# Altium PCB PCB1.PcbDoc (part 1 of 2)
Units mil, origin at the board's own origin, x right, y up, seen from the top; angles counter-clockwise.
Board outline 2560 x 1880 mil, 4 copper layers (Top Layer, GND, VCC, Bottom Layer), stack 23.756 mil thick; 154 components, 113 nets, 515 pads, 218 vias.
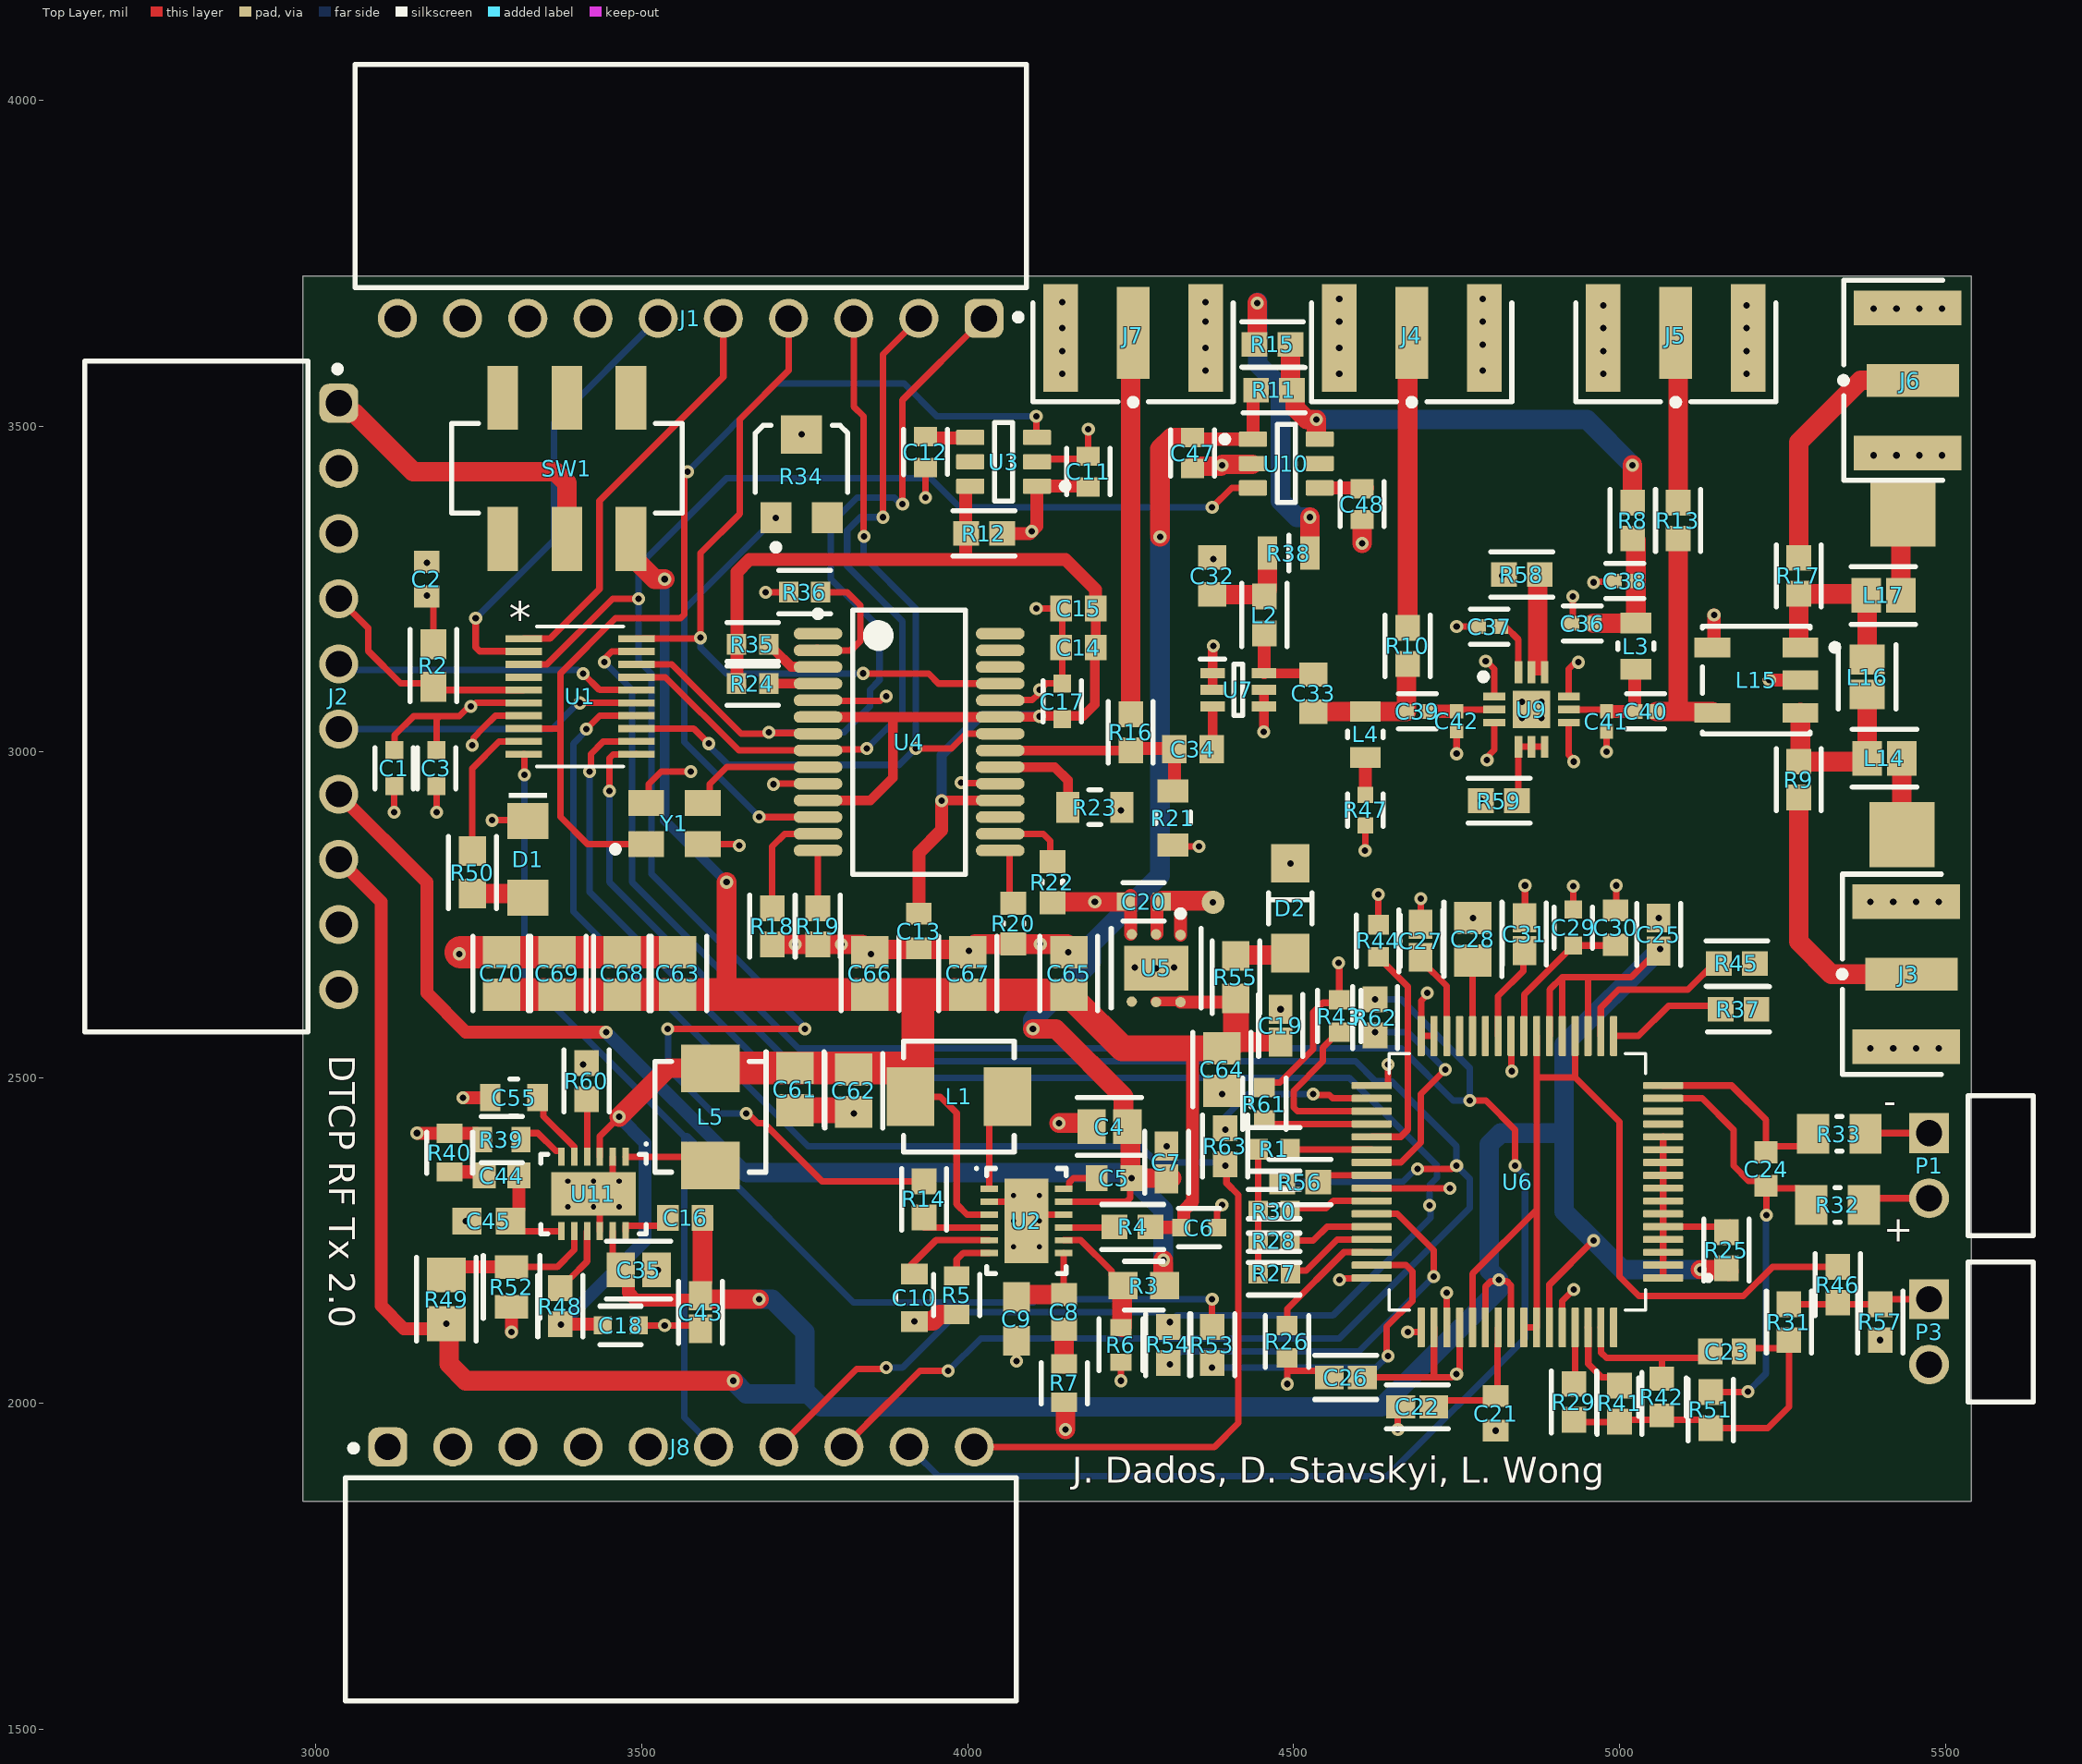
[diagram p0: Top Layer view]
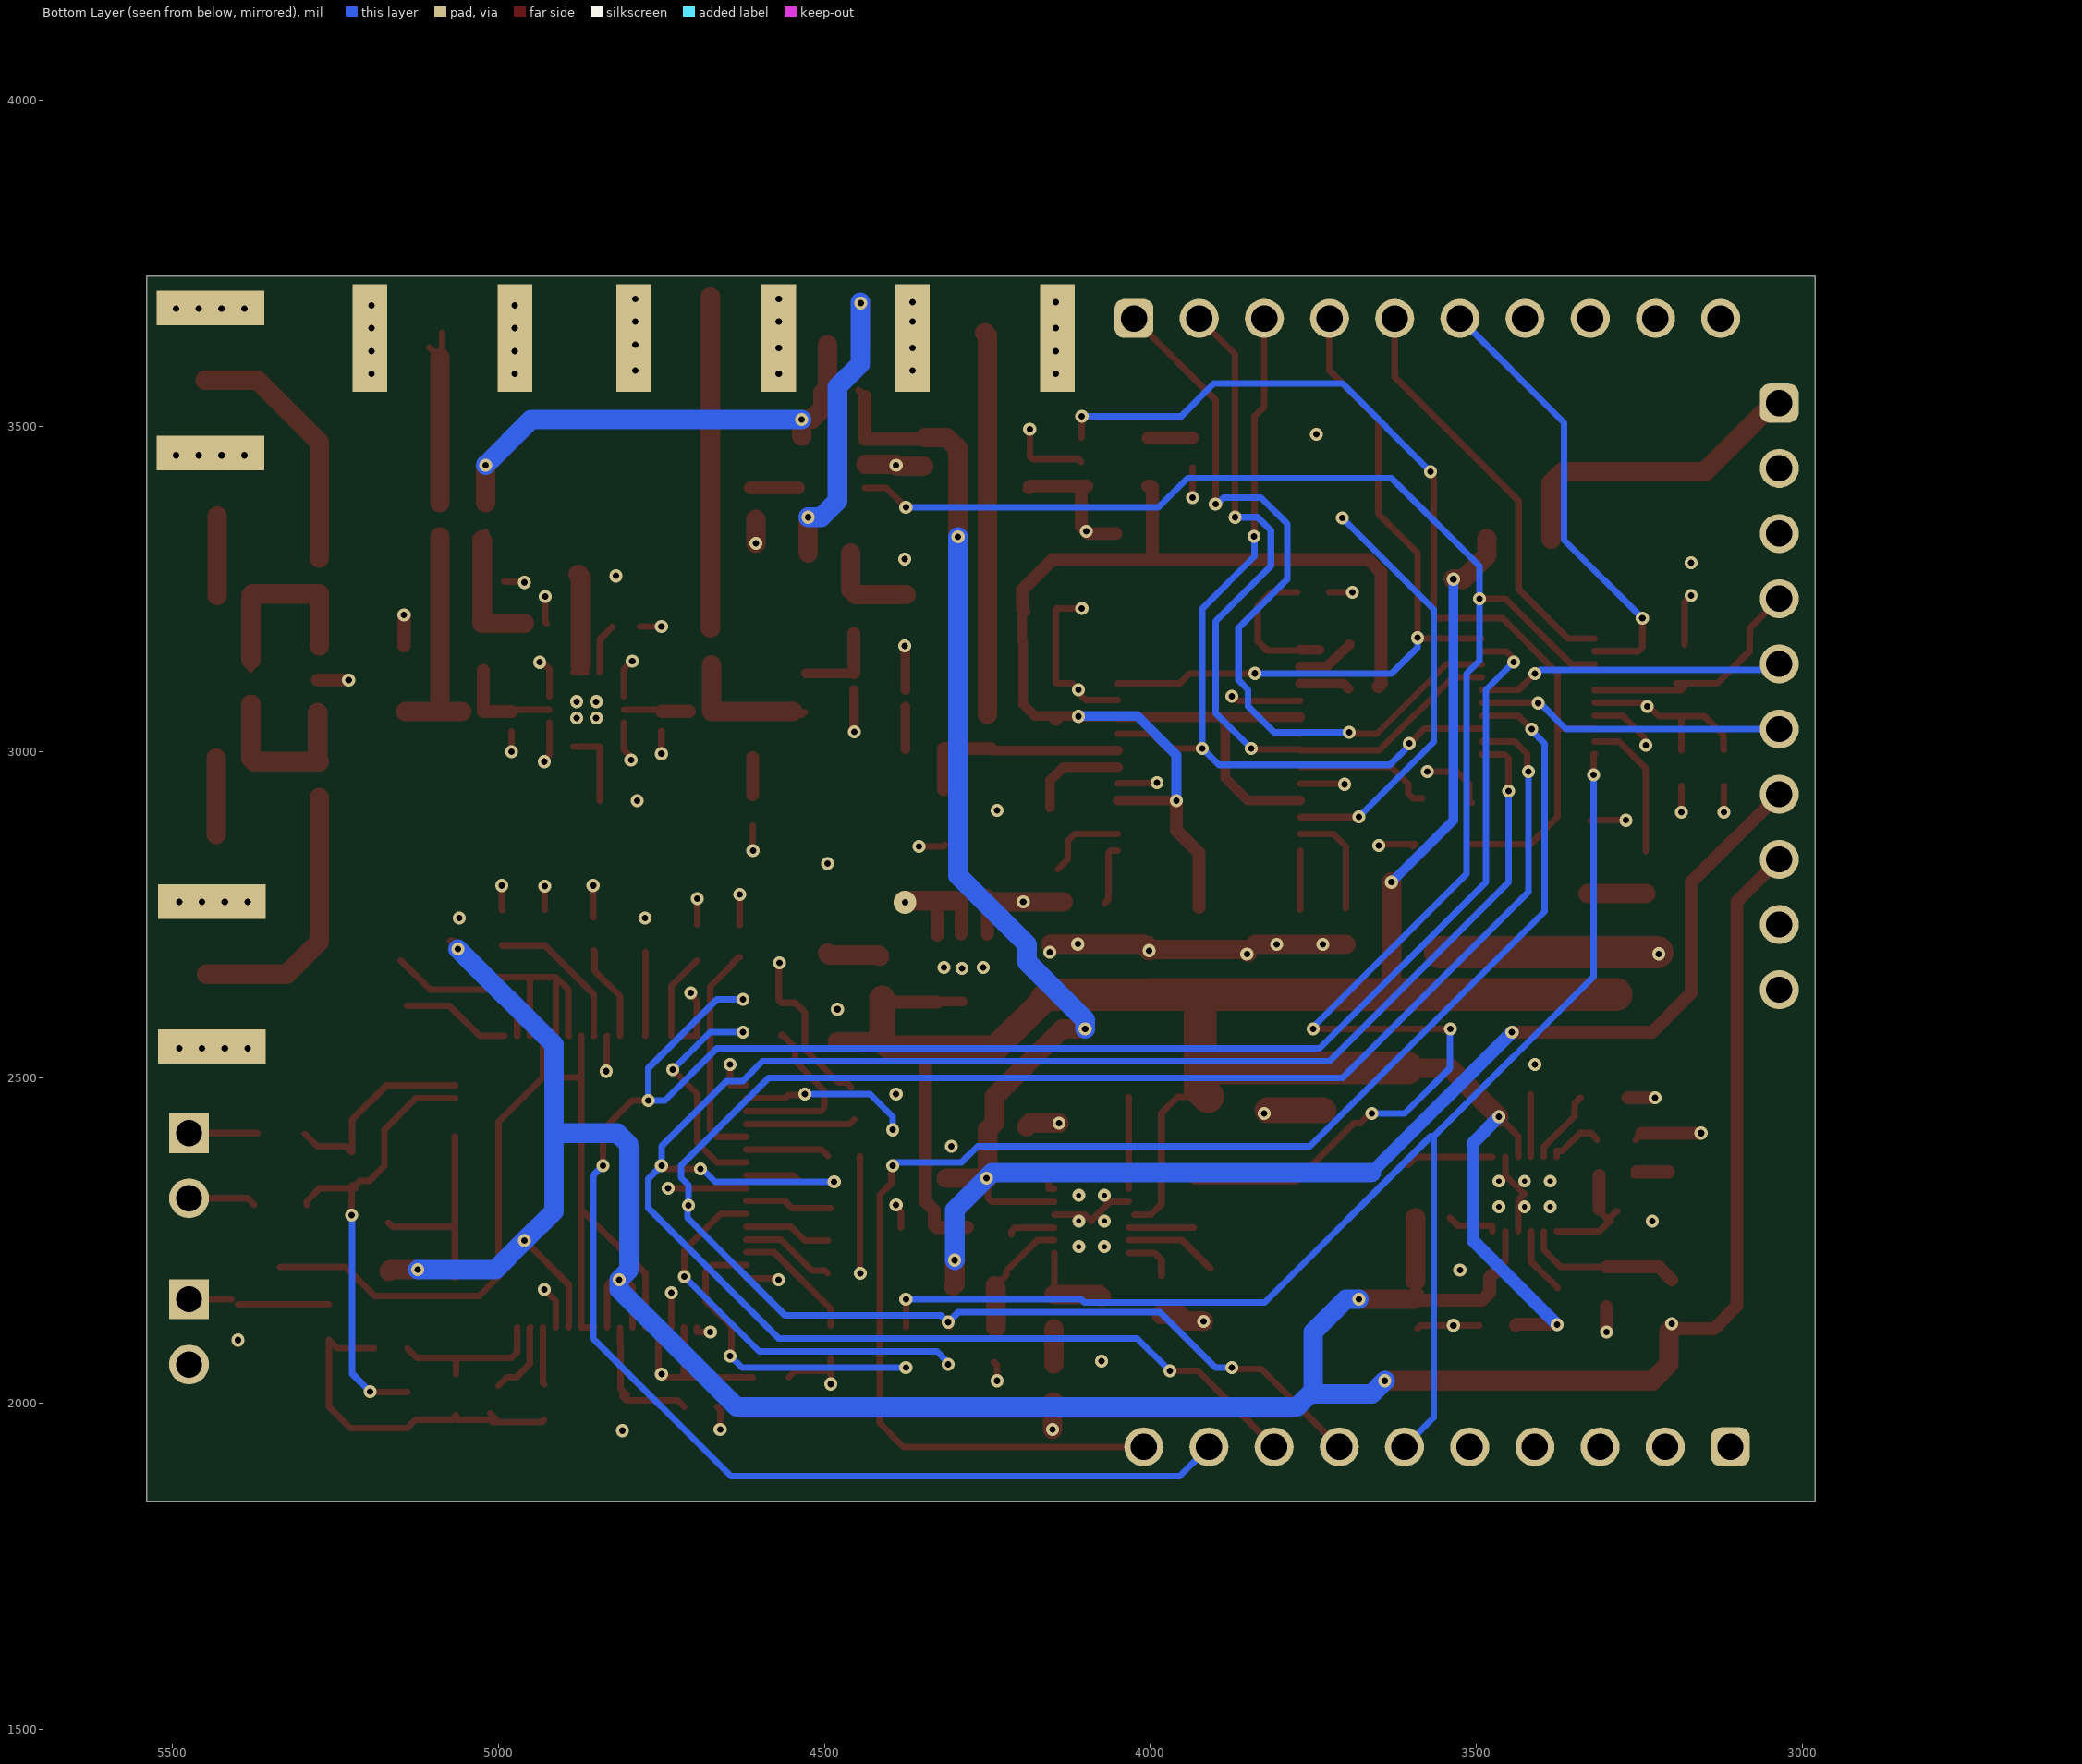
[diagram p1: Bottom Layer view, seen from below]

## Layer stack, top to bottom
Top Solder: solder mask 0.4, Solder Resist, Dk 3.5
Top Layer: signal copper 1.4
Dielectric 2: prepreg 2.8, PP-006, Dk 4.1
GND: signal copper 1.378
Dielectric 1: dielectric 12.6, FR-4, Dk 4.8
VCC: signal copper 1.378
Dielectric 3: prepreg 2.8, PP-006, Dk 4.1
Bottom Layer: signal copper 1.4
Bottom Solder: solder mask 0.4, Solder Resist, Dk 3.5

## Board outline
2980,1850 2980,3730 5540,3730 5540,1850

## Design rules (kind name [scope] priority, off if disabled: settings)
AssemblyTestPointUsage [All] p0: scope1count=1 scope1_0_kind=Board scope1_0_value=Board scope2count=1 scope2_0_kind=Board scope2_0_value=Board commentlength=0
AssemblyTestpoint [All] p0: scope1count=1 scope1_0_kind=Board scope1_0_value=Board scope2count=1 scope2_0_kind=Board scope2_0_value=Board commentlength=0
Clearance [All] p0: scope1count=1 scope1_0_kind=Board scope1_0_value=Board scope2count=1 scope2_0_kind=Board scope2_0_value=Board commentlength=0 gap=10
Clearance [All] p1: gap=10 ignorepadtopadclearanceinfootprint=FALSE except(0: Arc-Hole Track-Hole SMDPad-Hole THPad-Hole Via-Hole Fill-Hole Poly-Hole Region-Hole Text-Hole; 2: SMDPad-SMDPad; 5: Arc-Arc Arc-Track Arc-SMDPad Track-Track Track-SMDPad; 20: Arc-Fill Arc-Poly Arc-Region Track-Fill Track-Poly Track-Region Fill-Fill Fill-Poly Fill-Region Poly-Poly Poly-Region Region-Region)
ComponentClearance [All] p0: scope1count=1 scope1_0_kind=Board scope1_0_value=Board scope2count=1 scope2_0_kind=Board scope2_0_value=Board commentlength=0 gap=10 collisioncheckmode=3
DiffPairsRouting [All] p0: scope1count=1 scope1_0_kind=Board scope1_0_value=Board scope2count=1 scope2_0_kind=Board scope2_0_value=Board commentlength=0
FabricationTestPointUsage [All] p0: scope1count=1 scope1_0_kind=Board scope1_0_value=Board scope2count=1 scope2_0_kind=Board scope2_0_value=Board commentlength=0 valid=0 allowmultiple=FALSE
FabricationTestpoint [All] p0: scope1count=1 scope1_0_kind=Board scope1_0_value=Board scope2count=1 scope2_0_kind=Board scope2_0_value=Board commentlength=0 side=3 testpointundercomponent=TRUE minsize=40 maxsize=100 preferedsize=60 minholesize=0 maxholesize=40 preferedholesize=32 testpointgrid=1
FanoutControl Fanout_BGA [All] p0 off: scope1count=1 scope1_0_kind=Board scope1_0_value=Board scope2count=1 scope2_0_kind=Board scope2_0_value=Board commentlength=69 // Protel DXP Scope 1 Expression Was: IsBGA   Fanout_BGA (Default Rule)
FanoutControl Fanout_LCC [All] p0 off: scope1count=1 scope1_0_kind=Board scope1_0_value=Board scope2count=1 scope2_0_kind=Board scope2_0_value=Board commentlength=69 // Protel DXP Scope 1 Expression Was: IsLCC   Fanout_LCC (Default Rule)
FanoutControl Fanout_SOIC [All] p0 off: scope1count=1 scope1_0_kind=Board scope1_0_value=Board scope2count=1 scope2_0_kind=Board scope2_0_value=Board commentlength=71 // Protel DXP Scope 1 Expression Was: IsSOIC   Fanout_SOIC (Default Rule)
FanoutControl Fanout_Small [All] p0 off: scope1count=1 scope1_0_kind=Board scope1_0_value=Board scope2count=1 scope2_0_kind=Board scope2_0_value=Board commentlength=84 // Protel DXP Scope 1 Expression Was: (CompPinCount < 5)   Fanout_Small (Default Rule)
FanoutControl Fanout_Default [All] p0: scope1count=1 scope1_0_kind=Board scope1_0_value=Board scope2count=1 scope2_0_kind=Board scope2_0_value=Board commentlength=30 // Fanout_Default (Default Rule)
Height [All] p0: scope1count=1 scope1_0_kind=Board scope1_0_value=Board scope2count=1 scope2_0_kind=Board scope2_0_value=Board commentlength=0
HoleSize [All] p0: scope1count=1 scope1_0_kind=Board scope1_0_value=Board scope2count=1 scope2_0_kind=Board scope2_0_value=Board commentlength=0 absolutevalues=TRUE maxlimit=100 minlimit=1 maxpercent=80.000 minpercent=20.000
HoleToHoleClearance [All] p0: scope1count=1 scope1_0_kind=Board scope1_0_value=Board scope2count=1 scope2_0_kind=Board scope2_0_value=Board commentlength=0
LayerPairs [All] p0: scope1count=1 scope1_0_kind=Board scope1_0_value=Board scope2count=1 scope2_0_kind=Board scope2_0_value=Board commentlength=0 enforce=TRUE
MinimumSolderMaskSliver [All] p0: scope1count=1 scope1_0_kind=Board scope1_0_value=Board scope2count=1 scope2_0_kind=Board scope2_0_value=Board commentlength=0
NetAntennae [All] p0: scope1count=1 scope1_0_kind=Board scope1_0_value=Board scope2count=1 scope2_0_kind=Board scope2_0_value=Board commentlength=0
PasteMaskExpansion [All] p0: scope1count=1 scope1_0_kind=Board scope1_0_value=Board scope2count=1 scope2_0_kind=Board scope2_0_value=Board commentlength=0 expansion=0
PlaneClearance [All] p0: scope1count=1 scope1_0_kind=Board scope1_0_value=Board scope2count=1 scope2_0_kind=Board scope2_0_value=Board commentlength=0 clearance=40
PlaneClearance [All] p1: clearance=40
PlaneConnect [All] p0: scope1count=1 scope1_0_kind=Board scope1_0_value=Board scope2count=1 scope2_0_kind=Board scope2_0_value=Board commentlength=0 planeconnectstyle=Relief reliefexpansion=20 reliefentries=4 reliefconductorwidth=10 reliefairgap=10
PolygonConnect [All] p0: scope1count=1 scope1_0_kind=Board scope1_0_value=Board scope2count=1 scope2_0_kind=Board scope2_0_value=Board commentlength=0 connectstyle=Direct reliefconductorwidth=10 reliefentries=4 polygonreliefangle="90 Angle"
PolygonConnect [All] p1: connectstyle=Direct reliefconductorwidth=10 reliefentries=4 polygonreliefangle="90 Angle" airgapwidth=10
RoutingCorners [All] p0: scope1count=1 scope1_0_kind=Board scope1_0_value=Board scope2count=1 scope2_0_kind=Board scope2_0_value=Board commentlength=0 cornerstyle=45-Degree minsetback=100 maxsetback=100
RoutingLayers [All] p0: scope1count=1 scope1_0_kind=Board scope1_0_value=Board scope2count=1 scope2_0_kind=Board scope2_0_value=Board commentlength=0 top layer=Automatic mid layer 1=Automatic mid layer 2=Automatic bottom layer=Automatic
RoutingPriority [All] p0: scope1count=1 scope1_0_kind=Board scope1_0_value=Board scope2count=1 scope2_0_kind=Board scope2_0_value=Board commentlength=0
RoutingTopology [All] p0: scope1count=1 scope1_0_kind=Board scope1_0_value=Board scope2count=1 scope2_0_kind=Board scope2_0_value=Board commentlength=0 topology=Shortest
RoutingVias [All] p0: scope1count=1 scope1_0_kind=Board scope1_0_value=Board scope2count=1 scope2_0_kind=Board scope2_0_value=Board commentlength=0 holewidth=28 width=50 viastyle="Through Hole" minholewidth=28 minwidth=50 maxholewidth=28 maxwidth=50
RoutingVias [All] p1: holewidth=28 width=50 viastyle="Through Hole" minholewidth=28 minwidth=50 maxholewidth=28 maxwidth=50
ShortCircuit [All] p0: scope1count=1 scope1_0_kind=Board scope1_0_value=Board scope2count=1 scope2_0_kind=Board scope2_0_value=Board commentlength=0 allowed=FALSE
SilkToBoardRegionClearance [All] p0: scope1count=1 scope1_0_kind=Board scope1_0_value=Board scope2count=1 scope2_0_kind=Board scope2_0_value=Board commentlength=0
SilkToSilkClearance [All] p0: scope1count=1 scope1_0_kind=Board scope1_0_value=Board scope2count=1 scope2_0_kind=Board scope2_0_value=Board commentlength=0
SilkToSolderMaskClearance [All] p0 off: scope1count=1 scope1_0_kind=Board scope1_0_value=Board scope2count=1 scope2_0_kind=Board scope2_0_value=Board commentlength=44 // Protel DXP Scope 1 Expression Was: IsPad
SolderMaskExpansion [All] p0: scope1count=1 scope1_0_kind=Board scope1_0_value=Board scope2count=1 scope2_0_kind=Board scope2_0_value=Board commentlength=0 expansion=4
SolderMaskExpansion [All] p1: expansion=4 istentingtop=FALSE
SupplyNets "Schematic Supply Nets_8" [All] p0: scope1count=1 scope1_0_kind=Net scope1_0_value=3V3 scope2count=1 scope2_0_kind=Board scope2_0_value=Board commentlength=0 voltage=0.000
SupplyNets "Schematic Supply Nets_7" [All] p0: scope1count=1 scope1_0_kind=Net scope1_0_value=3V3DDS scope2count=1 scope2_0_kind=Board scope2_0_value=Board commentlength=0 voltage=0.000
SupplyNets "Schematic Supply Nets_6" [All] p0: scope1count=1 scope1_0_kind=Net scope1_0_value=13V0 scope2count=1 scope2_0_kind=Board scope2_0_value=Board commentlength=0 voltage=0.000
SupplyNets "Schematic Supply Nets_5" [All] p0: scope1count=1 scope1_0_kind=Net scope1_0_value=13V0PA scope2count=1 scope2_0_kind=Board scope2_0_value=Board commentlength=0 voltage=0.000
SupplyNets "Schematic Supply Nets_4" [All] p0: scope1count=1 scope1_0_kind=Net scope1_0_value=VBAT scope2count=1 scope2_0_kind=Board scope2_0_value=Board commentlength=0 voltage=0.000
SupplyNets "Schematic Supply Nets_3" [All] p0: scope1count=1 scope1_0_kind=Net scope1_0_value=GND scope2count=1 scope2_0_kind=Board scope2_0_value=Board commentlength=0 voltage=0.000
SupplyNets "Schematic Supply Nets_2" [All] p0: scope1count=1 scope1_0_kind=Net scope1_0_value=AFE_AGND scope2count=1 scope2_0_kind=Board scope2_0_value=Board commentlength=0 voltage=0.000
SupplyNets "Schematic Supply Nets_1" [All] p0: scope1count=1 scope1_0_kind=Net scope1_0_value=PA1_VDD scope2count=1 scope2_0_kind=Board scope2_0_value=Board commentlength=0 voltage=0.000
SupplyNets "Schematic Supply Nets" [All] p0: scope1count=1 scope1_0_kind=Net scope1_0_value=5V0 scope2count=1 scope2_0_kind=Board scope2_0_value=Board commentlength=0 voltage=0.000
SupplyNets "Schematic Supply Nets_8" [InNet('3V3')] p1: voltage=0.000
SupplyNets "Schematic Supply Nets_7" [InNet('3V3DDS')] p2: voltage=0.000
SupplyNets "Schematic Supply Nets_6" [InNet('13V0')] p3: voltage=0.000
SupplyNets "Schematic Supply Nets_5" [InNet('13V0PA')] p4: voltage=0.000
SupplyNets "Schematic Supply Nets_4" [InNet('VBAT')] p5: voltage=0.000
SupplyNets "Schematic Supply Nets_3" [InNet('GND')] p6: voltage=0.000
SupplyNets "Schematic Supply Nets_2" [InNet('AFE_AGND')] p7: voltage=0.000
SupplyNets "Schematic Supply Nets_1" [InNet('PA1_VDD')] p8: voltage=0.000
SupplyNets "Schematic Supply Nets" [InNet('5V0')] p9: voltage=0.000
UnRoutedNet [All] p0: scope1count=1 scope1_0_kind=Board scope1_0_value=Board scope2count=1 scope2_0_kind=Board scope2_0_value=Board commentlength=0
UnpouredPolygon [All] p0: scope1count=1 scope1_0_kind=Board scope1_0_value=Board scope2count=1 scope2_0_kind=Board scope2_0_value=Board commentlength=0
Width [All] p0: scope1count=1 scope1_0_kind=Board scope1_0_value=Board scope2count=1 scope2_0_kind=Board scope2_0_value=Board commentlength=0 maxlimit=80 minlimit=10 preferedwidth=10
Width [All] p1: maxlimit=80 minlimit=10 preferedwidth=10
29 further rules are at their usual default settings.

## Classes and differential pairs
component class "U_Boost 5V": C16 C18 C35 C43 C44 C45 C55 L5 R39 R40 R48 R49 R52 R60 U11
component class U_Switch2: C47 C48 U10
component class U_Switch1: C11 C12 U3
component class "U_PA stage 2": C36 C37 C38 C39 C40 C41 C42 L3 L4 R47 R58 R59 U9
component class "U_PA stage 1": C32 C33 C34 L2 R38 U7
component class U_Output: L14 L15 L16 L17
component class U_LDO: C19 C20 U5
component class U_DDS: C13 C14 C15 C17 R18 R19 R20 R21 R22 R23 R24 R34 R35 R36 U4 Y1
component class U_AFE: C21 C22 C23 C24 C25 C26 C27 C28 C29 C30 C31 R1 R25 R26 R27 R28 R29 R30 R31 R32 R33 R37 R41 R42 R43 R44 R45 R46 R51 R53 R54 R56 R57 R61 R62 R63 U6
component class U_MCU: C1 C2 C3 D1 R2 R50 U1
component class System: C61 C62 C63 C64 C65 C66 C67 C68 C69 C70 D2 J1 J2 J3 J4 J5 J6 J7 J8 P1 P3 R8 R9 R10 R11 R12 R13 R15 R16 R17 R55 SW1
component class "U_Boost 12V": C4 C5 C6 C7 C8 C9 C10 L1 R3 R4 R5 R6 R7 R14 U2

## Components (designator, comment, footprint, x,y, rotation, side; value= is the part's Value field where it differs from the comment)
C1 "C1608X5R1A106K080AC" FP-C1608-080-0_1-MFG 3120,2975 r90 top
C2 "VJ0603Y104KXJAP" CAPC1608X92X38NL15T08 3170,3265 r270 top
C3 "C1608X5R1A106K080AC" FP-C1608-080-0_1-MFG 3185,2975 r90 top
C4 "CC0805MKX5R8BB226" FP-CC0805-0_2-1_45-IPC_C 4217.41,2425 r180 top
C5 "VJ0603Y104KXJAP" CAPC1608X92X38NL15T08 4224.57,2345.87 r0 top
C6 "C1608X5R1A106K080AC" FP-C1608-080-0_1-MFG 4355,2270 r180 top
C7 "C1608X5R1H105K080AB" FP-C1608-080-0_1-IPC_B 4305,2370 r90 top
C8 "C0603C331J5GALTU" CAPC1608X87X35NL15T15 4147.99,2140.87 r90 top
C9 "VJ0603A100KXAAC" CAPC1608X92X38ML12T08 4075,2130 r90 top
C10 "C2012X5R1E475K125AB" FP-C2012-125-0_2-MFG 3917.99,2162.28 r270 top
C11 "C0603C106M8PACTU" FP-C0603C106M8PACTU-MFG 4185,3430 r270 top
C12 "C0603C101K4GAC7867" FP-C0603C-CF-MFG 3935,3460 r90 top
C13 "VJ0603Y104KXJAP" CAPC1608X92X38NL15T08 3925,2725 r90 top
C14 "VJ0603Y104KXJAP" CAPC1608X92X38NL15T08 4170,3160 r0 top
C15 "VJ0603Y104KXJAP" CAPC1608X92X38NL15T08 4170,3220 r0 top
C16 "VJ0603Y104KXJAP" CAPC1608X92X38NL15T08 3566.57,2285 r0 top
C17 "C1608X5R1A106K080AC" FP-C1608-080-0_1-MFG 4145,3077.44 r270 top
C18 "C1608X5R1A106K080AC" FP-C1608-080-0_1-MFG 3467.44,2120 r180 top
C19 "C1608X5R1H105K080AB" FP-C1608-080-0_1-IPC_B 4480,2580 r90 top
C20 "C1608X5R1A106K080AC" FP-C1608-080-0_1-MFG 4270,2770 r0 top
C21 "VJ0603Y104KXJAP" CAPC1608X92X38NL15T08 4810,1985 r270 top
C22 "C1608X5R1H105K080AB" FP-C1608-080-0_1-IPC_B 4689.78,1995 r180 top
C23 "VJ0603Y152JXACW1BC" CAPC1608X95X40NL15T15 5165,2080 r180 top
C24 "06035C472KAZ2A" CAPC1608X90X35LL15T15 5225,2360 r90 top
C25 "C1608X5R1H105K080AB" FP-C1608-080-0_1-IPC_B 5060,2719.78 r90 top
C26 "C1608X5R1H105K080AB" FP-C1608-080-0_1-IPC_B 4580,2040 r180 top
C27 "C1608X5R1H105K080AB" FP-C1608-080-0_1-IPC_B 4695,2710 r90 top
C28 "GRM21BR60J107ME15K" FP-GRM21B-0_2-e0_2_0_7-IPC_B 4775,2712.51 r90 top
C29 "C1608X5R1A106K080AC" FP-C1608-080-0_1-MFG 4929.1,2730.39 r270 top
C30 "VJ0603Y104KXJAP" CAPC1608X92X38NL15T08 4994.1,2730.39 r270 top
C31 "C1608X5R1H105K080AB" FP-C1608-080-0_1-IPC_B 4854.1,2720.39 r90 top
C32 "VJ0603Y183KXAAC" CAPC1608X92X38ML15T08 4375,3270 r90 top
C33 "VJ0603Y183KXAAC" CAPC1608X92X38ML15T08 4530,3090 r270 top
C34 "VJ0603Y183KXAAC" CAPC1608X92X38ML15T08 4345.59,3004.41 r0 top
C35 "CC0805MKX5R8BB226" FP-CC0805-0_2-1_45-IPC_C 3495,2205 r0 top
C36 "GRM155R71H104KE14D" FP-GRM155-0_05-IPC_B 4943.21,3197.09 r0 top
C37 "GRM155R71H104KE14D" FP-GRM155-0_05-IPC_B 4800.08,3192.09 r0 top
C38 "GRM1555C1H102JA01D" FP-GRM155-0_05-IPC_B 5008.21,3262.09 r0 top
C39 "GRM1555C1H102JA01D" FP-GRM155-0_05-IPC_B 4690.08,3062.09 r0 top
C40 "GRM1555C1H102JA01D" FP-GRM155-0_05-IPC_B 5040.08,3062.09 r0 top
C41 "GRM1555C1HR40WA01D" CAPC1005X55X25LL05T10 4980.08,3046.73 r90 top
C42 "GRM1555C1HR40WA01D" CAPC1005X55X25LL05T10 4750.08,3047.09 r90 top
C43 "C1608X5R1H105K080AB" FP-C1608-080-0_1-IPC_B 3590,2140 r270 top
C44 "C0603C331J5GALTU" CAPC1608X87X35NL15T15 3285,2350 r0 top
C45 "VJ0603A100KXAAC" CAPC1608X92X38ML12T08 3265,2280 r0 top
C47 "C0603C106M8PACTU" FP-C0603C106M8PACTU-MFG 4345,3458.62 r90 top
C48 "C0603C101K4GAC7867" FP-C0603C-CF-MFG 4605,3380 r90 top
C55 "C2012X5R1E475K125AB" FP-C2012-125-0_2-MFG 3303.58,2469.49 r180 top
C61 "GRM21BR60J107ME15K" FP-GRM21B-0_2-e0_2_0_7-IPC_B 3735,2482.51 r270 top
C62 "GRM21BR60J107ME15K" FP-GRM21B-0_2-e0_2_0_7-IPC_B 3825,2480 r270 top
C63 "GRM21BR60J107ME15K" FP-GRM21B-0_2-e0_2_0_7-IPC_B 3555,2660 r90 top
C64 "GRM21BR60J107ME15K" FP-GRM21B-0_2-e0_2_0_7-IPC_B 4390,2512.51 r270 top
C65 "GRM21BR60J107ME15K" FP-GRM21B-0_2-e0_2_0_7-IPC_B 4155,2660 r90 top
C66 "GRM21BR60J107ME15K" FP-GRM21B-0_2-e0_2_0_7-IPC_B 3850,2660 r90 top
C67 "GRM21BR60J107ME15K" FP-GRM21B-0_2-e0_2_0_7-IPC_B 4000,2660 r90 top
C68 "GRM21BR60J107ME15K" FP-GRM21B-0_2-e0_2_0_7-IPC_B 3470,2660 r90 top
C69 "GRM21BR60J107ME15K" FP-GRM21B-0_2-e0_2_0_7-IPC_B 3370,2660 r90 top
C70 "GRM21BR60J107ME15K" FP-GRM21B-0_2-e0_2_0_7-IPC_B 3285,2660 r90 top
D1 "150120SS75000" WL-SMCW_1206_150120xx75000 3325,2835 r270 top
D2 "HSMG-C150" FP-HSMG-C150-MFG 4495,2760 r270 top
J1 "613010143121" 613010143121 3575,3883.51 r180 top
J2 "613010143121" 613010143121 2816.49,3085 r270 top
J3 "SMA-J-P-H-ST-EM1" FP-SMA-J-P-H-ST-EM1-MFG 5710.08,2658.78 r90 top
J4 "SMA-J-P-H-ST-EM1" FP-SMA-J-P-H-ST-EM1-MFG 4681.22,3905.08 r180 top
J5 "SMA-J-P-H-ST-EM1" FP-SMA-J-P-H-ST-EM1-MFG 5086.22,3905.08 r180 top
J6 "SMA-J-P-H-ST-EM1" FP-SMA-J-P-H-ST-EM1-MFG 5712.2,3570 r90 top
J7 "SMA-J-P-H-ST-EM1" FP-SMA-J-P-H-ST-EM1-MFG 4253.78,3905.08 r180 top
J8 "613010143121" 613010143121 3560,1715 r0 top
L1 "IHLP1616BZER4R7M11" FP-IHLP-1616BZ-FP_1_8545x-MFG 3986.34,2470.87 r0 top
L2 "LQM18NNR82K00D" FP-LQM18NN_00-IPC_B 4455,3210 r90 top
L3 "0805LS-152XJEC" FP-LQW21HN_00-MFG 5025.08,3162.09 r90 top
L4 "LQW21HN1R5J00L" FP-LQW21HN_00-MFG 4610.08,3026.65 r90 top
L5 "IHLP1616BZER4R7M11" FP-IHLP-1616BZ-FP_1_8545x-MFG 3605,2440 r270 top
L14 "MLZ2012M1R0HTD25" FP-MLZ2012-1_25-IPC_C 5406.61,2990 r0 top
L15 "MABAES0060" FP-MABAES0060-MFG 5210,3110 r0 top
L16 "MLZ2012M1R0HTD25" FP-MLZ2012-1_25-IPC_C 5380,3115 r270 top
L17 "MLZ2012M1R0HTD25" FP-MLZ2012-1_25-IPC_C 5405,3240 r180 top
P1 "TSW-102-08-G-S-RA" SMTC-TSW-102-08-X-S-RA 5475,2415 r270 top
P3 "TSW-102-08-G-S-RA" SMTC-TSW-102-08-X-S-RA 5475,2160 r270 top
R1 "CRGCQ0603J10K" FP-CRGCQ0603-IPC_C 4470,2390 r180 top
R2 "ESR03EZPF3301" FP-ESR03-IPC_A 3180,3132.44 r90 top
R3 "RN73H1JTTD1113D25" FP-CRCW0603-e3-IPC_A 4270.09,2180.87 r0 top
R4 "RMCF0603ZG0R00" FP-RMCF0603-IPC_B 4252.99,2270.87 r180 top
R5 "CRCW060357K6FKEA" FP-CRCW0603-e3-MFG 3982.99,2166.34 r90 top
R6 "AC0603FR-1311K3L" FP-AC0603-IPC_C 4235,2090 r90 top
R7 "CRCW060386K6FKEAHP" FP-CRCW0603-HPe3-MFG 4147.99,2031.34 r90 top
R8 "RMCF0603ZG0R00" FP-RMCF0603-IPC_B 5020,3355 r90 top
R9 "RMCF0603ZG0R00" FP-RMCF0603-IPC_B 5275,2957.4 r270 top
R10 "RMCF0603ZG0R00" FP-RMCF0603-IPC_B 4675,3162.6 r270 top
R11 "DNF" FP-RMCF0603-IPC_B 4470,3555 r180 top
R12 "DNF" FP-RMCF0603-IPC_B 4025,3335 r0 top
R13 "RMCF0603ZG0R00" FP-RMCF0603-IPC_B 5090,3355 r270 top
R14 "RMCF0603ZG0R00" FP-RMCF0603-IPC_B 3932.99,2313.26 r270 top
R15 "RMCF0603ZG0R00" FP-RMCF0603-IPC_B 4467.6,3625 r0 top
R16 "RMCF0603ZG0R00" FP-RMCF0603-IPC_B 4250,3030 r270 top
R17 "RMCF0603ZG0R00" FP-RMCF0603-IPC_B 5275,3270 r270 top
R18 "DNF" FP-RMCF0603-IPC_B 3700,2732.4 r90 top
R19 "DNF" FP-RMCF0603-IPC_B 3770,2732.4 r90 top
R20 "DNF" RESC0603(1608)_N 4070,2736.5 r270 top
R21 "AC0805JR-0782RL" FP-AC0805-MFG 4315,2898.66 r270 top
R22 "DNF" RESC0603(1608)_N 4130,2800 r270 top
R23 "AC0805JR-0782RL" FP-AC0805-MFG 4195,2915 r0 top
R24 "CRGCQ0603J10K" FP-CRGCQ0603-IPC_C 3670,3105 r0 top
R25 "RMCF0603ZG0R00" FP-RMCF0603-IPC_B 5164.1,2235.39 r270 top
R26 "CRGCQ0603J10K" FP-CRGCQ0603-IPC_C 4490,2095 r270 top
R27 "CRGCQ0603J10K" FP-CRGCQ0603-IPC_C 4470.32,2200 r180 top
R28 "CRGCQ0603J10K" FP-CRGCQ0603-IPC_C 4470,2250 r180 top
R29 "RMCF0603ZG0R00" FP-RMCF0603-IPC_B 4930,2002.4 r90 top
R30 "CRGCQ0603J10K" FP-CRGCQ0603-IPC_C 4470,2295 r180 top
R31 "DNF" FP-RMCF0603-IPC_B 5260,2125 r90 top
R32 "CRCW08055K00FKTA" RESC2013X50X30ML20T20 5334.65,2305 r180 top
R33 "CRCW08055K00FKTA" RESC2013X50X30ML20T20 5337.23,2413.77 r180 top
R34 "TC33X-2-103E" BOUR-TC33X-2_V 3745,3430 r90 top
R35 "CRGCQ0603J10K" FP-CRGCQ0603-IPC_C 3670,3165 r0 top
R36 "CRGCQ0603J10K" FP-CRGCQ0603-IPC_C 3749.68,3245 r0 top
R37 "RMCF0603ZG0R00" FP-RMCF0603-IPC_B 5182.6,2605 r180 top
R38 "MCU08050C5109FP500" FP-MCU0805-IPC_C 4492.45,3305 r0 top
R39 "CRCW060357K6FKEA" FP-CRCW0603-e3-MFG 3285,2405 r0 top
R40 "CRCW060386K6FKEAHP" FP-CRCW0603-HPe3-MFG 3205,2385 r270 top
R41 "RMCF0603ZG0R00" FP-RMCF0603-IPC_B 5000,2000 r90 top
R42 "CRCW06031M00JNEA" FP-CRCW0603-e3-IPC_B 5065,2010 r90 top
R43 "CRGCQ0603J10K" FP-CRGCQ0603-IPC_C 4570,2594.68 r90 top
R44 "CRGCQ0603J10K" FP-CRGCQ0603-IPC_C 4630,2710 r90 top
R45 "RMCF0603ZG0R00" FP-RMCF0603-IPC_B 5180,2675 r0 top
R46 "DNF" FP-RMCF0603-IPC_B 5335,2182.4 r90 top
R47 "FCHP0402E50R0BBT1" FP-FC0402-MFG 4610.08,2910.59 r90 top
R48 "RMCF0603ZG0R00" FP-RMCF0603-IPC_B 3375,2149.49 r90 top
R49 "TFCR0805-10W-E-4222BT-1K" FP-TFCR0805-IPC_A 3200,2160 r270 top
R50 "CRCW0603220RFKEAHP" FP-CRCW0603-HPe3-IPC_A 3240,2815 r90 top
R51 "RMCF0603ZG0R00" FP-RMCF0603-IPC_B 5140,1990 r90 top
R52 "CRGP0805F10K" FP-CRGP0805-IPC_C 3300,2178.93 r90 top
R53 "RMCF0603ZG0R00" FP-RMCF0603-IPC_B 4375,2090 r90 top
R54 "RMCF0603ZG0R00" FP-RMCF0603-IPC_B 4307.5,2090 r90 top
R55 "CRCW0603220RFKEAHP" FP-CRCW0603-HPe3-IPC_A 4411.41,2654.17 r270 top
R56 "RMCF0603ZG0R00" FP-RMCF0603-IPC_B 4510,2340 r180 top
R57 "DNF" FP-RMCF0603-IPC_B 5400,2125 r90 top
R58 "RMCF0603ZG0R00" FP-RMCF0603-IPC_B 4850.08,3272.09 r0 top
R59 "RMCF0603ZG0R00" FP-RMCF0603-IPC_B 4815,2925 r0 top
R60 "RMCF0603ZG0R00" FP-RMCF0603-IPC_B 3415,2495 r270 top
R61 "CRGCQ0603J10K" FP-CRGCQ0603-IPC_C 4455,2460 r90 top
R62 "RMCF0603ZG0R00" FP-RMCF0603-IPC_B 4625,2592.4 r90 top
R63 "RMCF0603ZG0R00" FP-RMCF0603-IPC_B 4395,2395 r90 top
SW1 "452406020024" 452406020024 3385,3435 r180 top
U1 "MSPM0C1104SDGS20R" DGS0020A_TEX 3405,3085 r0 top
U2 "LTC3122EDE#PBF" LT-DE-UE-12_V 4090.08,2280.08 r0 top
U3 "TPS22810TDBVRQ1" FP-DBV0006A-MFG 4055,3445 r180 top
U4 "AD9850BRSZ-REEL" ADI-RS-28_N 3910,3015 r0 top
U5 "LD39200PU33R" FP-DFN6-7946637-MFG 4289.01,2667.99 r270 top
U6 "ADS1299-4PAG" QFP50P1200X1200X120-64N 4843.31,2340.39 r180 top
U7 "TQP369184" SOT65P210X110-6N 4415,3095 r0 top
U9 "PMA3-43-1W+" QFN51P300X300X89-13N 4865,3065 r0 top
U10 "TPS22810TDBVRQ1" FP-DBV0006A-MFG 4488.82,3442.4 r0 top
U11 "LTC3122EDE#PBF" LT-DE-UE-12_V 3425.79,2321.57 r270 top
Y1 "830207044109" WE-SPXO_CFPS-39 3550,2890 r0 top

## Footprints (in the part's own frame and the unit in brackets; to place one, negate y for a bottom-side part, rotate by r counter-clockwise, add the part's x,y. Pads: shape width x height; smd on the part's side, far side on the other; paste and mask are expansions set on the pad)
452406020024 [mm] "SMT Mini Slide Switch, Same Side Connection, body 9.00 x 3.50 mm"
  rect 1.2x2.5 smd: 1(2.5,2.75) 2(0,2.75) 3(-2.5,2.75) 4(2.5,-2.75) 5(0,-2.75) 6(-2.5,-2.75)
  silkscreen extent -4.5,-1.75 4.5,1.75
613010143121 [mm] "Socket Header, Pitch 2.54 mm, THT, Angled, single row, 10p"
  rrect50% 1.52x1.52 hole 1.02: 1(-11.43,5.55)
  round 1.52 hole 1.02: 2(-8.89,5.55) 3(-6.35,5.55) 4(-3.81,5.55) 5(-1.27,5.55) 6(1.27,5.55) 7(3.81,5.55) 8(6.35,5.55) 9(8.89,5.55) 10(11.43,5.55)
  silkscreen extent -13.08,-4.35 13.08,5.62
ADI-RS-28_N [mm] "SOP, 28-Leads, Body 10.2x5.3mm, Pitch 0.65mm, IPC Medium Density"
  oval 1.9x0.45 smd: 1(-3.55,4.225) 2(-3.55,3.575) 3(-3.55,2.925) 4(-3.55,2.275) 5(-3.55,1.625) 6(-3.55,0.975) 7(-3.55,0.325) 8(-3.55,-0.325) 9(-3.55,-0.975) 10(-3.55,-1.625) 11(-3.55,-2.275) 12(-3.55,-2.925) 13(-3.55,-3.575) 14(-3.55,-4.225) 15(3.55,-4.225) 16(3.55,-3.575) 17(3.55,-2.925) 18(3.55,-2.275) 19(3.55,-1.625) 20(3.55,-0.975) 21(3.55,-0.325) 22(3.55,0.325) 23(3.55,0.975) 24(3.55,1.625) 25(3.55,2.275) 26(3.55,2.925) 27(3.55,3.575) 28(3.55,4.225)
  silkscreen extent -3.67,-5.15 2.2,5.15
BOUR-TC33X-2_V [mm] "SMD, 3-Leads, Body 3.8x3.6mm"
  rect 1.2x1.2 smd: 1(-1.8,1) 3(-1.8,-1)
  rect 1.5x1.6 smd: 2(1.45,0)
  silkscreen extent -3.07,-1.8 1.8,1.8
CAPC1005X55X25LL05T10 [mm] "Chip Capacitor, 2-Leads, Body 1.00x0.50mm, IPC High Density"
  rect 0.56x0.52 smd: 1(-0.39,0) 2(0.39,0)
CAPC1608X87X35NL15T15 [mm] "Chip Capacitor, 2-Leads, Body 1.60x0.80mm, IPC Medium Density"
  rect 0.9x1 smd: 1(-0.675,0) 2(0.675,0)
CAPC1608X90X35LL15T15 [mm] "Chip Capacitor, 2-Leads, Body 1.60x0.81mm, IPC High Density"
  rect 0.85x0.9 smd: 1(-0.65,0) 2(0.65,0)
CAPC1608X92X38ML12T08 [mm] "Chip Capacitor, 2-Leads, Body 1.60x0.80mm, IPC Low Density"
  rect 1.15x1.05 smd: 1(-0.85,0) 2(0.85,0)
CAPC1608X92X38ML15T08 [mm] "Chip Capacitor, 2-Leads, Body 1.60x0.80mm, IPC Low Density"
  rect 0.95x1.1 smd: 1(-0.725,0) 2(0.725,0)
CAPC1608X92X38NL15T08 [mm] "Chip Capacitor, 2-Leads, Body 1.60x0.80mm, IPC Medium Density"
  rect 0.85x1 smd: 1(-0.675,0) 2(0.675,0)
CAPC1608X95X40NL15T15 [mm] "Chip Capacitor, 2-Leads, Body 1.60x0.80mm, IPC Medium Density"
  rect 0.95x1 smd: 1(-0.65,0) 2(0.65,0)
DGS0020A_TEX [mil]
  rect 56x11 smd paste+0 mask+0: 1(-86.5,88.58) 2(-86.5,68.9) 3(-86.5,49.21) 4(-86.5,29.53) 5(-86.5,9.84) 6(-86.5,-9.84) 7(-86.5,-29.53) 8(-86.5,-49.21) 9(-86.5,-68.9) 10(-86.5,-88.58) 11(86.5,-88.58) 12(86.5,-68.9) 13(86.5,-49.21) 14(86.5,-29.53) 15(86.5,-9.84) 16(86.5,9.84) 17(86.5,29.53) 18(86.5,49.21) 19(86.5,68.9) 20(86.5,88.58)
  silkscreen extent -66,-108 66,108
FP-AC0603-IPC_C [mil]
  rect 25.93x31.97 smd paste+0 mask+0: 1(-26.64,0) 2(26.64,0)
  silkscreen extent -40,-33 40,33
FP-AC0805-MFG [mm]
  rect 0.9x1.2 smd paste+0 mask+0: 1(-1.05,0) 2(1.05,0)
  silkscreen extent -0.23,-0.67 0.23,0.67
FP-C0603C106M8PACTU-MFG [mm]
  rect 0.75x0.9 smd paste+0 mask+0: 1(-0.6,0) 2(0.6,0)
  silkscreen extent -0.9,-0.85 0.9,0.85
FP-C0603C-CF-MFG [mm]
  rect 0.75x0.9 smd paste+0 mask+0: 1(-0.6,0) 2(0.6,0)
  silkscreen extent -0.87,-0.85 0.88,0.85
FP-C1608-080-0_1-IPC_B [mil]
  rect 44.53x35.91 smd paste+0 mask+0: 1(-25.22,0) 2(25.22,0)
  silkscreen extent -47,-34 47,34
FP-C1608-080-0_1-MFG [mm]
  rect 0.7x0.7 smd paste+0 mask+0: 1(-0.7,0) 2(0.7,0)
  silkscreen extent -0.8,-0.75 0.8,0.75
FP-C2012-125-0_2-MFG [mm]
  rect 0.8x1.05 smd paste+0 mask+0: 1(-0.925,0) 2(0.925,0)
  silkscreen extent -0.15,-0.72 0.15,0.72
FP-CC0805-0_2-1_45-IPC_C [mil]
  rect 43.49x53.39 smd paste+0 mask+0: 1(-27.59,0) 2(27.59,0)
  silkscreen extent -49,-44 49,44
FP-CRCW0603-e3-IPC_A [mil]
  rect 44.69x41.82 smd paste+0 mask+0: 1(-32.1,0) 2(32.1,0)
  silkscreen extent -30,-37 30,37
FP-CRCW0603-e3-IPC_B [mil]
  rect 36.81x37.88 smd paste+0 mask+0: 1(-28.17,0) 2(28.17,0)
  silkscreen extent -30,-37 30,35
FP-CRCW0603-e3-MFG [mm]
  rect 0.75x1 smd paste+0 mask+0: 1(-0.75,0) 2(0.75,0)
  silkscreen extent -0.8,-0.9 0.8,0.9
FP-CRCW0603-HPe3-IPC_A [mil]
  rect 45.6x41.82 smd paste+0 mask+0: 1(-32.56,0) 2(32.56,0)
  silkscreen extent -55,-37 55,37
FP-CRCW0603-HPe3-MFG [mm]
  rect 0.75x1 smd paste+0 mask+0: 1(-0.75,0) 2(0.75,0)
  silkscreen extent -0.8,-0.9 0.8,0.9
FP-CRGCQ0603-IPC_C [mil]
  rect 29.85x31.97 smd paste+0 mask+0: 1(-24.68,0) 2(24.68,0)
  silkscreen extent -40,-33 40,33
FP-CRGP0805-IPC_C [mil]
  rect 35.67x51.57 smd paste+0 mask+0: 1(-30.55,0) 2(30.55,0)
  silkscreen extent -48,-43 48,43
FP-DBV0006A-MFG [mm]
  rrect17% 1.1x0.6 smd paste+0 mask+0: 1(-1.3,0.95) 2(-1.3,0) 3(-1.3,-0.95) 4(1.3,-0.95) 5(1.3,0) 6(1.3,0.95)
  silkscreen extent -2.53,-1.53 0.35,1.53
FP-DFN6-7946637-MFG [mm]
  round 0.405 smd paste+0 mask+0: 1(-1.3,0.95) 2(-1.321,0) 3(-1.321,-0.95) 4(1.3,-0.95) 5(1.321,0) 6(1.321,0.95)
  rect 1.75x2.5 smd paste+0 mask+0: 7(0,0)
  silkscreen extent -2.25,-1.75 1.55,1.75
FP-ESR03-IPC_A [mil]
  rect 45.6x39.85 smd paste+0 mask+0: 1(-32.56,0) 2(32.56,0)
  silkscreen extent -55,-36 55,36
FP-FC0402-MFG [mm]
  rect 0.635x0.61 smd paste+0 mask+0: 1(-0.597,0) 2(0.597,0)
  silkscreen extent -0.64,-0.7 0.64,0.7
FP-GRM21B-0_2-e0_2_0_7-IPC_B [mil]
  rect 49.4x57.33 smd paste+0 mask+0: 1(-32.51,0) 2(32.51,0)
  silkscreen extent -57,-44 57,44
FP-GRM155-0_05-IPC_B [mil]
  rect 24.23x22.54 smd paste+0 mask+0: 1(-16.87,0) 2(16.87,0)
  silkscreen extent -29,-27 29,27
FP-HSMG-C150-MFG [mm]
  rect 1.5x1.5 smd paste+0 mask+0: 1(-1.75,0) 2(1.75,0)
  silkscreen extent -0.6,-0.85 0.6,0.85
FP-IHLP-1616BZ-FP_1_8545x-MFG [mil]
  rect 73.01x90 smd paste+0 mask+0: 1(-74.5,0) 2(74.5,0)
  silkscreen extent -85,-85 85,85
FP-LQM18NN_00-IPC_B [mil]
  rect 39.63x37.73 smd paste+0 mask+0: 1(-28.58,0) 2(28.58,0)
  silkscreen extent -48,-35 48,35
FP-LQW21HN_00-MFG [mm]
  rect 0.8x1.2 smd paste+0 mask+0: 1(-0.9,0) 2(0.9,0)
  silkscreen extent -0.13,-0.7 0.13,0.7
FP-MABAES0060-MFG [mm]
  rect 1.4x0.76 smd paste+0 mask+0: 1(1.715,1.27) 2(1.715,0) 3(1.715,-1.27) 4(-1.715,-1.27) 5(-1.715,1.27)
  silkscreen extent -2.09,-2.09 3.18,2.09
FP-MCU0805-IPC_C [mil]
  rect 29.87x51.5 smd paste+0 mask+0: 1(-32.55,0) 2(32.55,0)
  silkscreen extent 0,-28 0,28
FP-MLZ2012-1_25-IPC_C [mil]
  rect 45.45x53.39 smd paste+0 mask+0: 1(-26.61,0) 2(26.61,0)
  silkscreen extent -49,-44 49,44
FP-RMCF0603-IPC_B [mil]
  rect 39.61x37.73 smd paste+0 mask+0: 1(-27.6,0) 2(27.6,0)
  silkscreen extent -47,-35 47,35
FP-SMA-J-P-H-ST-EM1-MFG [mm]
  rect 1.27x3.6 smd paste+0 mask+0: 1(0,6.66)
  rect 1.35x4.2 smd paste+0 mask+0: 2(-2.825,6.86) 3(2.825,6.86)
  rect 1.35x4.2 smd far side paste+0 mask+0: 4(-2.825,6.86) 5(2.825,6.86)
  silkscreen extent -3.9,5.5 3.9,9.48
FP-TFCR0805-IPC_A [mil]
  rect 53.38x59.38 smd paste+0 mask+0: 1(-37.45,0) 2(37.45,0)
  silkscreen extent -64,-45 64,45
LT-DE-UE-12_V [mm] "SON, 12-Leads, Body 4x3mm, Pitch 0.5mm, Thermal Pad 3.3x1.7mm"
  rect 0.7x0.25 smd: 1(-1.45,1.25) 2(-1.45,0.75) 3(-1.45,0.25) 4(-1.45,-0.25) 5(-1.45,-0.75) 6(-1.45,-1.25) 7(1.45,-1.25) 8(1.45,-0.75) 9(1.45,-0.25) 10(1.45,0.25) 11(1.45,0.75) 12(1.45,1.25)
  rect 1.7x3.3 smd: 13(0,0)
  silkscreen extent -2,-2.05 1.55,2.1
QFN51P300X300X89-13N [mm]
  rect 0.85x0.3 smd: 1(-1.45,0.51) 2(-1.45,0) 3(-1.45,-0.51) 7(1.45,-0.51) 8(1.45,0) 9(1.45,0.51)
  rect 0.3x0.85 smd: 4(-0.51,-1.45) 5(0,-1.45) 6(0.51,-1.45) 10(0.51,1.45) 11(0,1.45) 12(-0.51,1.45)
  rect 1.45x1.45 smd: 13(0,0)
  silkscreen extent -2,1.15 -1.75,1.4
QFP50P1200X1200X120-64N [mm]
  rrect25% 1.56x0.28 smd: 1(-5.68,3.75) 2(-5.68,3.25) 3(-5.68,2.75) 4(-5.68,2.25) 5(-5.68,1.75) 6(-5.68,1.25) 7(-5.68,0.75) 8(-5.68,0.25) 9(-5.68,-0.25) 10(-5.68,-0.75) 11(-5.68,-1.25) 12(-5.68,-1.75) 13(-5.68,-2.25) 14(-5.68,-2.75) 15(-5.68,-3.25) 16(-5.68,-3.75) 33(5.68,-3.75) 34(5.68,-3.25) 35(5.68,-2.75) 36(5.68,-2.25) 37(5.68,-1.75) 38(5.68,-1.25) 39(5.68,-0.75) 40(5.68,-0.25) 41(5.68,0.25) 42(5.68,0.75) 43(5.68,1.25) 44(5.68,1.75) 45(5.68,2.25) 46(5.68,2.75) 47(5.68,3.25) 48(5.68,3.75)
  rrect25% 0.28x1.56 smd: 17(-3.75,-5.68) 18(-3.25,-5.68) 19(-2.75,-5.68) 20(-2.25,-5.68) 21(-1.75,-5.68) 22(-1.25,-5.68) 23(-0.75,-5.68) 24(-0.25,-5.68) 25(0.25,-5.68) 26(0.75,-5.68) 27(1.25,-5.68) 28(1.75,-5.68) 29(2.25,-5.68) 30(2.75,-5.68) 31(3.25,-5.68) 32(3.75,-5.68) 49(3.75,5.68) 50(3.25,5.68) 51(2.75,5.68) 52(2.25,5.68) 53(1.75,5.68) 54(1.25,5.68) 55(0.75,5.68) 56(0.25,5.68) 57(-0.25,5.68) 58(-0.75,5.68) 59(-1.25,5.68) 60(-1.75,5.68) 61(-2.25,5.68) 62(-2.75,5.68) 63(-3.25,5.68) 64(-3.75,5.68)
  silkscreen extent -7.54,-5 5,5
RESC0603(1608)_N [mm] "Chip Resistor, Body 1.6x0.8mm, IPC Medium Density"
  rect 0.9x1 smd: 1(-0.8,0) 2(0.8,0)
  silkscreen extent -0.05,-0.4 0.05,0.4
RESC2013X50X30ML20T20 [mm] "Chip Resistor, 2-Leads, Body 2.00x1.25mm, IPC Low Density"
  rect 1.25x1.55 smd: 1(-1.025,0) 2(1.025,0)
  silkscreen extent -0.1,-0.67 0.1,0.67
SMTC-TSW-102-08-X-S-RA [mm] ".025 SQ Post Terminal Strip Assembly, 1x2 Pins, Right Angle, 2.54mm Pitch, Male"
  rect 1.55x1.55 hole 1.02: 1(0,0)
  round 1.55 hole 1.02: 2(2.54,0)
  silkscreen extent -1.46,1.52 4,4.06
SOT65P210X110-6N [mm]
  rect 0.95x0.4 smd: 1(-1,0.65) 2(-1,0) 3(-1,-0.65) 4(1,-0.65) 5(1,0) 6(1,0.65)
  silkscreen extent -1.48,-1 0.18,1.2
WE-SPXO_CFPS-39 [mm] "Simple Packaged Quartz Oscillator, body 3.2x2.5mm"
  rect 1.4x1 smd: 1(-1.1,-0.8) 2(1.1,-0.8) 3(1.1,0.8) 4(-1.1,0.8)
  silkscreen extent -2.42,-1.12 -2.17,-0.88
WL-SMCW_1206_150120xx75000 [mm] "SMD Mono-color Chip LED, body 3.2x1.6mm"
  rect 1.4x1.6 smd: 1(-1.5,0) 2(1.5,0)
  silkscreen extent -2.6,-0.75 -2.4,0.75

## Part data
C1 C3 C6 C17 C18 C20 C29: library part CMP-2000-04979-3, "Multilayer Ceramic Capacitors 10µF ±10% 10V X5R SMD 0603"
C2 C5 C13 C14 C15 C16 C21 C30: library part CMP-2006-01211-1
C4 C35: library part CMP-03422-001497-1, "CAP CER 22UF 25V X5R 0805"
C7 C19 C22 C25 C26 C27 C31 C43: library part CMP-2000-06025-2, "Multilayer Ceramic Capacitors 1µF ±10% 50V X5R SMD 0603"
C8 C44: library part CMP-2006-03564-1
C9 C45: library part CMP-2006-02012-1
C10 C55: library part CMP-08246-004908-1, "Multilayer Ceramic Capacitors 4.7µF ±10% 25V X5R SMD 0805"
C11 C47: library part CMP-03020-034654-1, "CAP CER 10UF 10V X5R 0603"
C12 C48: library part CMP-03020-014723-2, "CAP CER 100PF 16V NP0 0603"
C23: library part CMP-2006-01561-1
C24: library part CMP-2006-04440-1
C28 C61 C62 C63 C64 C65 C66 C67 C68 C69 C70: library part CMP-06035-052658-1, "Chip Multilayer Ceramic Capacitors for General Purpose, 0805, 100uF, X5R, 15%, 20%, 6.3V"
C32 C33 C34: library part CMP-2006-01326-1
C36 C37: library part CMP-2008-04639-2, "Chip Multilayer Ceramic Capacitors for General Purpose, 0402, 0.10uF, X7R, 15%, 10%, 50V"
C38 C39 C40: library part CMP-2008-04254-2, "Chip Multilayer Ceramic Capacitors for General Purpose, 0402, 1000pF, C0G, 30ppm/°C, 5%, 50V"
C41 C42: library part CMP-1034-00010-2
D1: library part CMP-1426-00017-3, "Led, Red, 630 Nm, 1.9 V, 30 Ma, 60 Mcd Rohs Compliant: Yes"
D2: library part CMP-2000-05061-2, "LED GREEN DIFFUSED 1206 SMD"
J1 J2 J8: library part CMP-1502-01419-3
J3 J4 J5 J6 J7: library part CMP-02754-000006-1, "CONN SMA JACK STR 50OHM EDGE MNT"
L1 L5: library part CMP-02424-000576-1, "Fixed Inductors Commercial Low DCR Series SMT 4.7uH 1.7A 105mO 20%"
L2: library part CMP-06042-016197-1, "Multilayer Type Inductor for General Circuits, 0603 (1608), 820nH, 10%, 2.1O, 35mA"
L3: library part CMP-06042-001639-1, "0805LS-152XJEC Coilcraft"
L4: library part CMP-06042-001639-1, "Wire Wound Ferrite type RF Inuctor 1.5uH ±5% 85mA 5.33O 0805 (2012)"
L14 L16 L17: library part CMP-08253-000383-1, "Shielded Multilayer Inductor 1uH ±20% 800mA 130mO AEC-Q200 SMD 0805"
L15: library part CMP-97513-000003-1, "BALUN 300KHZ-200MHZ 1:1 6SMD"
P1 P3: library part CMP-1024-00320-1, "0.025\" SQ Post Header, Through-hole, Right Angle, -55 to 125 degC, 2.54 mm Pitch, 2-Pin, Male, RoHS"
R1 R24 R26 R27 R28 R30 R35 R36 R43 R44 R61: library part CMP-03211-009884-1, "CRGCQ 0603 10K 5%"
R2: library part CMP-08839-028747-1, "3.3kO ±1% 0.25W 0603 Anti-Surge Chip Resistor AEC-Q200"
R3: library part CMP-2000-03018-2, "RES 111K OHM 0.5% 1/10W 0603"
R4 R8 R9 R10 R11 R12 R13 R14 R15 R16 R17 R18 R19 R25 R29 R31 R37 R41 R45 R46 R48 R51 R53 R54 R56 R57 R58 R59 R60 R62 R63: library part CMP-26527-006412-1, "0O ±0 0.1W 0603 Thick Film Chip Resistor AEC-Q200 compliant"
R5 R39: library part CMP-2000-03475-2, "RES Thick Film, 57.6kO, 1%, 0.1W, 100ppm/°C, 0603"
R6: library part CMP-03412-022585-2, "RES 11.3KO 1.00% 0.1W 0603"
R7 R40: library part CMP-02407-006337-1, "RES Thick Film, 86.6kO, 1%, 0.33W, 100ppm/°C, 0603"
R20 R22: library part CMP-1012-00736-1, "100K 0.1W 1% 0603 (1608 Metric)  SMD"
R21 R23: library part CMP-03412-037249-1, "RES SMD 82 OHM 5% 1/8W 0805"
R32 R33: library part CMP-2001-04239-1
R34: library part CMP-2100-03695-1, "Trimming Potentiometer, 10000 Ohm, -40 to 100 degC, 3-Pin SMD, RoHS, Tape and Reel"
R38: library part CMP-02407-000931-1, "RES 1.05K OHM 0.5% 1/5W 0805"
R42: library part CMP-2000-03016-2, "RES Thick Film, 1MO, 5%, 0.1W, 200ppm/°C, 0603"
R47: library part CMP-05494-120702529-1, "FCHP0402E50R0BBT1 SMD Chip Resistor, 50 Ohm, ± 0.1%, 1 W, 0402 [1005 Metric], Thin Film, High Frequency"
R49: library part CMP-250906-237835-1, "RES Thin Film,  42.2kO, 0.1%, 0.1W, 25ppm/°C, 0805"
R50 R55: library part CMP-02407-003593-1, "RES Thick Film, 220O, 1%, 0.33W, 100ppm/°C, 0603"
R52: library part CMP-03211-006861-1, "CRGP 0805 10K 1%"
SW1: library part CMP-03913-146831046-1, "Ws-slsv_smt Mini Slide Switch Sa"
U1: "24MHz Arm® Cortex®-M0+ MCU with 16KB flash, 1KB SRAM, 12-bit ADC 20-VSSOP -40 to 125"
U2 U11: library part CMP-0492-00369-1, "2.5 A Synchronous Step-Up DC/DC Converter with Output Disconnect, 12-pin SON (DE-UE-12), -40 to 125 degC, Pb-Free"
U3 U10: library part CMP-04910-000007-2, "IC PWR SWITCH N-CHAN 1:1 SOT23-6"
U4: library part CMP-0293-00041-1, "CMOS, 125 MHz Complete DDS Synthesizer, 10-Bit, Parallel, Serial, RS-28, 1500 Reel, Pb-Free"
U5: library part CMP-12153-000011-1, "IC REG LINEAR 3.3V 2A 6DFN"
U6: "Low-Noise, 4-Channel, 24-Bit Analog-to-Digital Converter for Biopotential Measurements"
U7: "DC  6 GHz Gain Block"
U9: "Integrated Circuit"
Y1: library part CMP-03913-116855802-1, "830207044109 WE-SPXO Crystal Oscillator"

## Free pads (board coordinates)
  rect 100x100 smd paste+0 mask+0: 2(5433.22,2873.22) 2(5435,3365)

## Via types
v1: diameter 20, hole 10, Top Layer to Bottom Layer, tented both sides, 205 vias
v2: diameter 19.68, hole 7.87, Top Layer to Bottom Layer, 12 vias
v3: diameter 35, hole 10, Top Layer to Bottom Layer, tented both sides, 1 vias

## Nets (pads, with @x,y where several pads share a name; then routed paths per layer and width w, separated by ;. In a path a pad name is that pad's centre, name@x,y a point inside that pad or via, vN(x,y) a via of type N, cw(c..) or ccw(c..) an arc to the next point about the centre after c; other vN are vias at no path point)
3V3: C1.2 C2.2 C3.2 C11.2 C20.2 C26.1 J2.9 R2.2 R12.2 R43.2 R61.2 U1.6 U3.1 U5.1 U5.2 U6.48 U6.50 U6.52 Y1.4 | length 1472
  Top Layer w10: C1.2@3120,3002.56 3120.48,3003.04 3120.48,3025.48 3150,3055 3190,3055 ; v1(3170,3240) 3180,3230 R2.2@3180,3165 ; C3.2@3185,3002.56 3185,3050 3190,3055 ; v1(3237.32,3069.84) 3234.62,3069.84 3219.77,3055 3190,3055 ; v1@3237.32,3072.68 3238.24,3071.76 3241.94,3071.76 3245.34,3075.16 U1.6@3318.5,3075.16 ; Y1.4@3506.69,2921.5 3510.32,2925.13 3510.32,2950.32 3529.82,2969.82 v1(3574.82,2969.82) ; R61.2@4458.94,2485 4458.94,2485.67 4465.99,2492.72 4479.09,2492.72 4530,2543.62 4530,2600 4544.87,2614.87 4565.5,2614.87 R43.2@4570,2619.37 v1@4570,2675 ; v1(4570.36,2190) 4573.06,2190 4575.3,2192.24 4619.17,2192.24 U6.48@4619.69,2192.75 ; C26.1@4610,2039.4 4610.6,2040 4742.29,2040 4747.29,2045 v1(4750,2045) 4750,2047.71 4754.73,2052.43 U6.52@4754.73,2116.77 ; 4715.36,2040.39 U6.50@4715.36,2116.77
  Top Layer w20: R12.2@4052.6,3335 4095,3335 v1(4098.09,3338.09) 4106.18,3346.18 U3.1@4106.18,3407.6 ; U3.1@4097.64,3407.6 U3.1@4106.18,3407.6 ; C11.2@4185,3406.38 C11.2@4186.38,3405 ; C11.2@4185,3407.6 U3.1@4106.18,3407.6 ; U5.2@4290.15,2721.15 C20.2@4290.15,2775 ; C20.2@4297.56,2770 C20.2@4299.03,2771.47 ; U5.1@4326.41,2719.17 4326.41,2771.47
  Top Layer w30: C20.2@4299.03,2771.47 4326.41,2771.47 4370.57,2771.47 4371.92,2770.12 4375.46,2770.12 v3(4376.41,2769.17)
  other v1: 4569.1,2676.29